# Altium PCB PCB_RUDRV2.PcbDoc
Units mm, origin at the board's own origin, x right, y up, seen from the top; angles counter-clockwise.
Board outline 79.75 x 99.93 mm, 2 copper layers (Top Layer, Bottom Layer); 62 components, 41 nets, 265 pads, 45 vias.
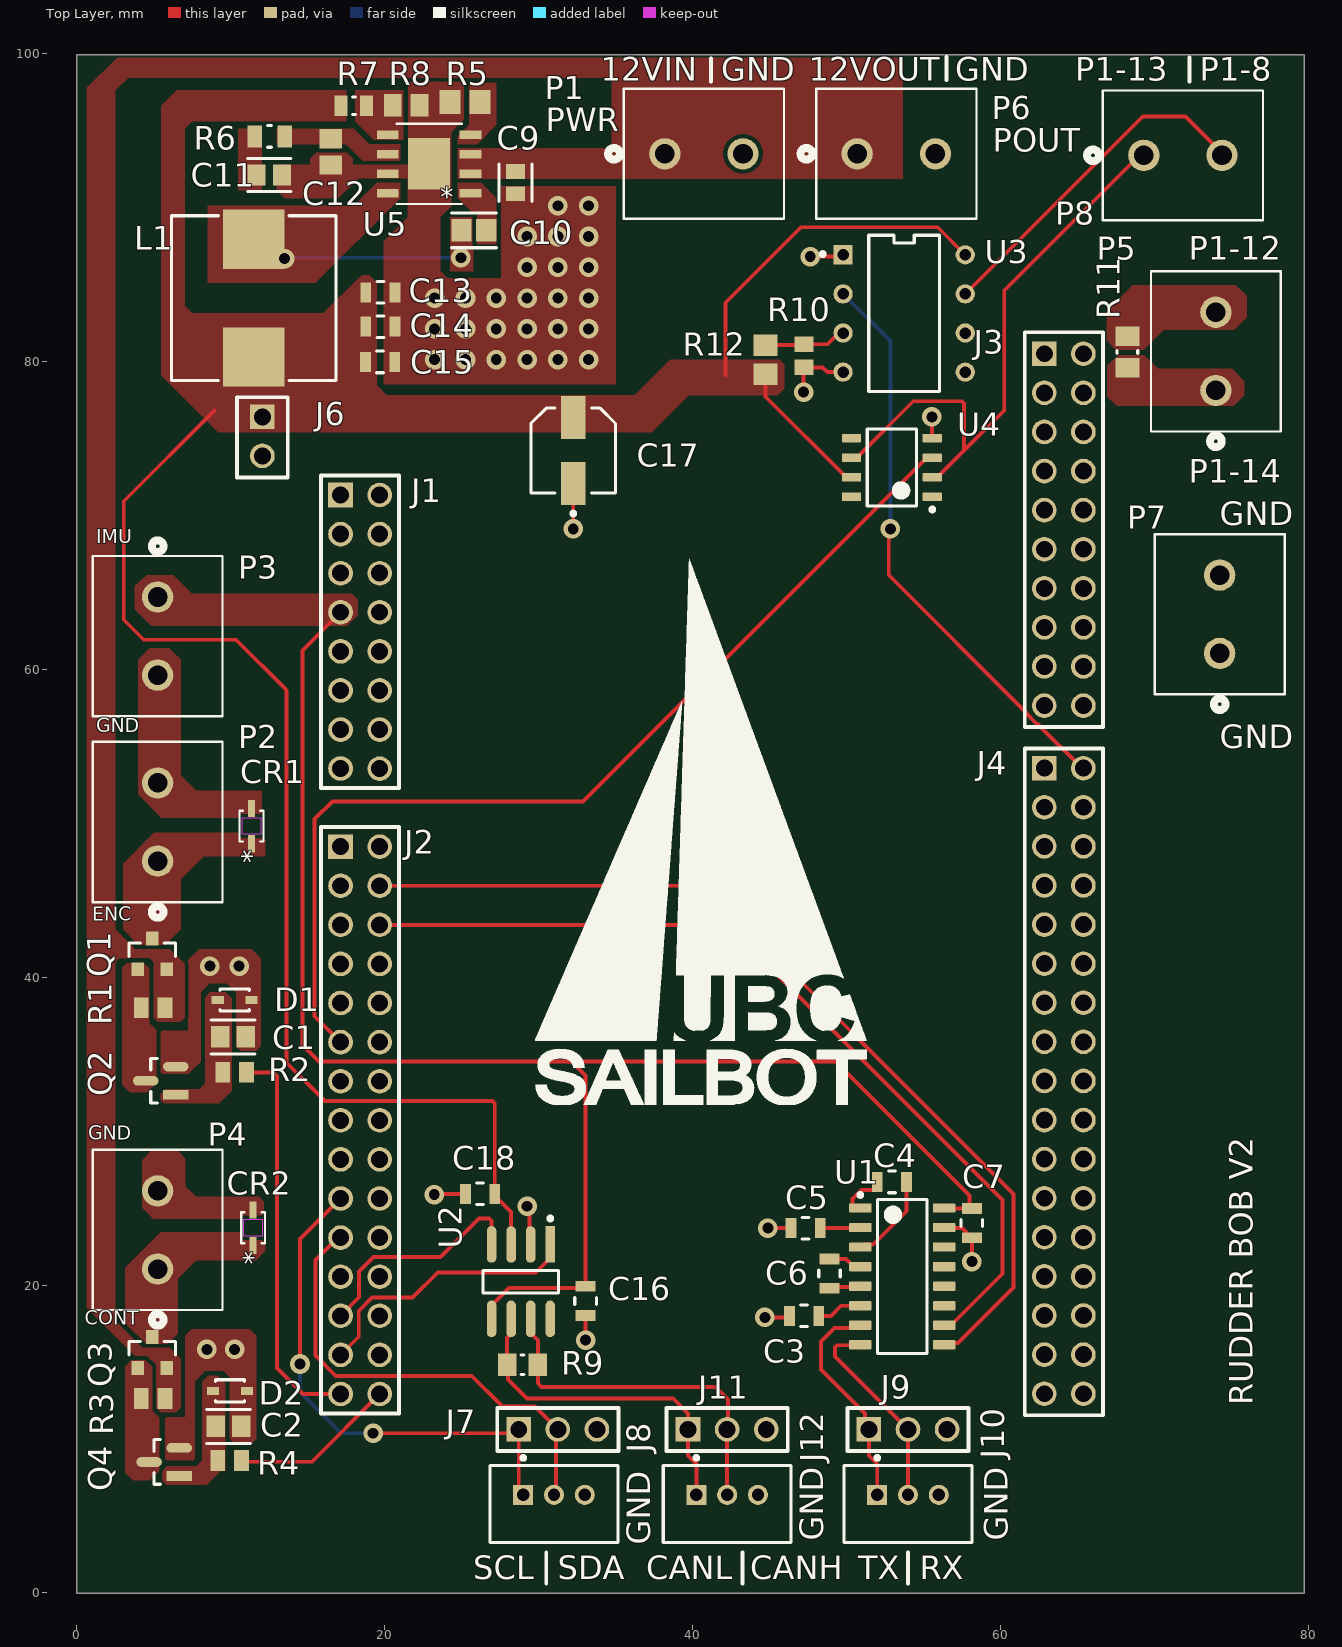
[diagram p0: Top Layer view]
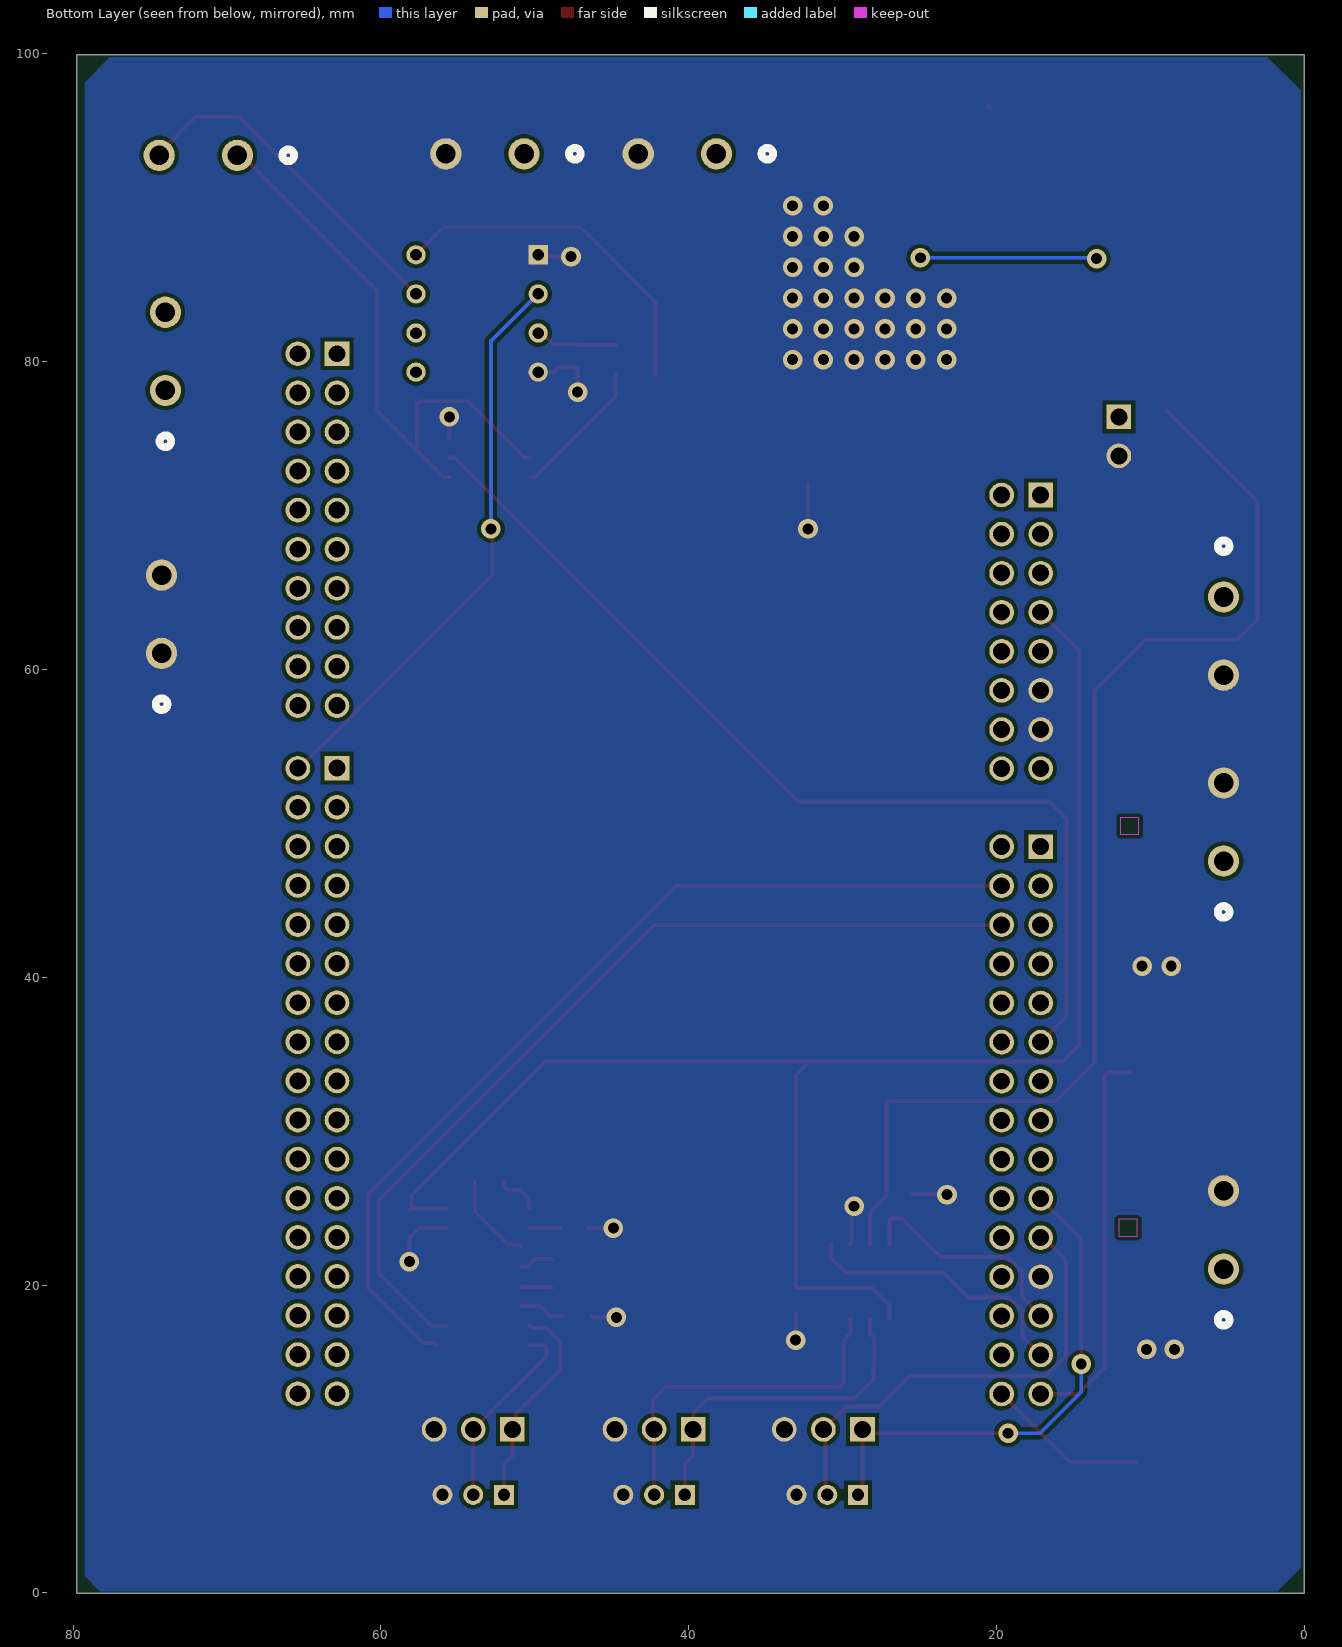
[diagram p1: Bottom Layer view, seen from below]
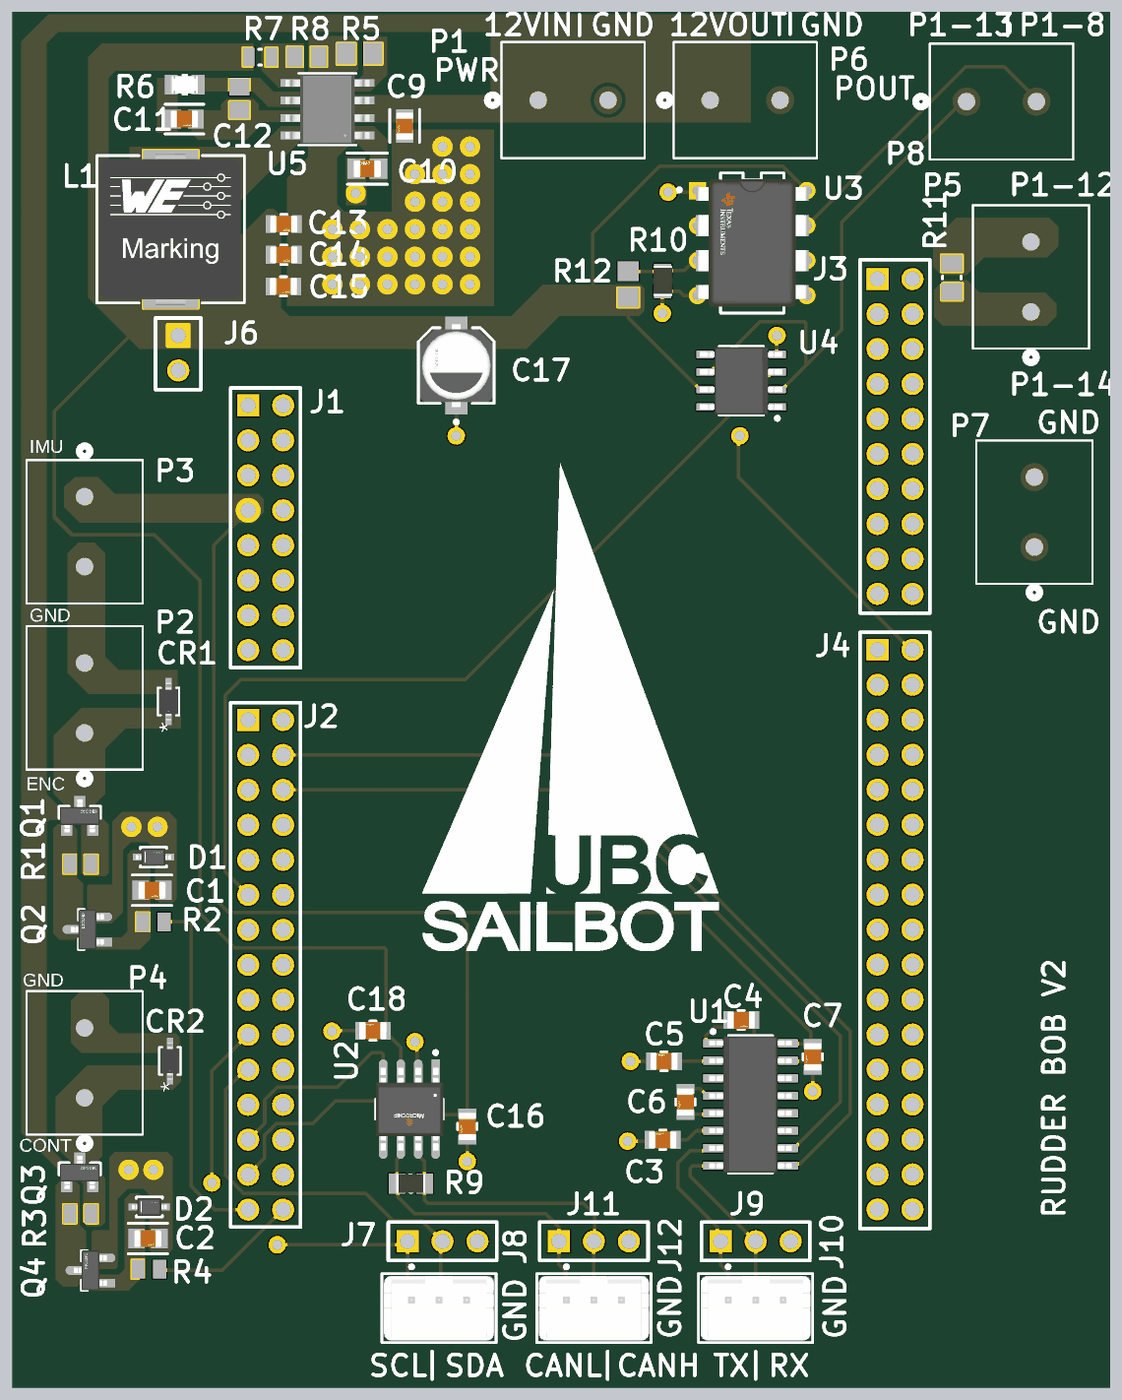
[diagram p2: 3D render of the assembled board from above, using the file's embedded part models]

## Layer stack, top to bottom
Top Solder: solder mask 0.0102, Solder Resist, Dk 3.5
Top Layer: signal copper 0.0356
Dielectric 1: dielectric 0.32, FR-4, Dk 4.8
Bottom Layer: signal copper 0.0356
Bottom Solder: solder mask 0.0102, Solder Resist, Dk 3.5

## Board outline
0.004,-0.01 79.75,-0.01 79.75,99.925 0.004,99.925

## Design rules (kind name [scope] priority, off if disabled: settings)
AssemblyTestPointUsage [All] p1: isadvanced=TRUE
AssemblyTestpoint [All] p1: isadvanced=TRUE testpointundercomponent=TRUE minsize=1.016 maxsize=2.54 preferedsize=1.524 minholesize=0 maxholesize=1.016 preferedholesize=0.813 testpointgrid=0.025 usegrid=TRUE gridtolerance=0 allowsidetop=TRUE allowsidebottom=TRUE
Clearance Clearance_1 [OnMid vs OnMid] p1: gap=0.254 ignorepadtopadclearanceinfootprint=FALSE sourcerule=39 cellrowname=All cellrowtype=0 cellcolname=All cellcoltype=0 innerlayers=TRUE
Clearance Clearance_2 [(ExistsOnLayer('Top Layer') Or ExistsOnLayer('Bottom Layer')) vs (ExistsOnLayer('Top Layer') Or ExistsOnLayer('Bottom Layer'))] p2: gap=0.254 ignorepadtopadclearanceinfootprint=FALSE sourcerule=39 cellrowname=All cellrowtype=0 cellcolname=All cellcoltype=0 outerlayers=TRUE
Clearance [All] p3: gap=0.254 ignorepadtopadclearanceinfootprint=FALSE ismatrix=TRUE
ComponentClearance [All] p1: isadvanced=TRUE gap=0.254 collisioncheckmode=3 verticalgap=0.254 showdistances=FALSE
FabricationTestPointUsage [All] p1: isadvanced=TRUE valid=0 allowmultiple=FALSE
FabricationTestpoint [All] p1: isadvanced=TRUE side=3 testpointundercomponent=TRUE minsize=1.016 maxsize=2.54 preferedsize=1.524 minholesize=0 maxholesize=1.016 preferedholesize=0.813 testpointgrid=0.025 allowsidetop=TRUE allowsidebottom=TRUE usegrid=TRUE gridtolerance=0
FanoutControl Fanout_BGA [IsBGA] p1: isadvanced=TRUE bgadir=Out bgaviamode=Centered fanoutstyle=Auto fanoutdirection=Alternating viagrid=0.025 // Fanout_BGA (Default Rule)
FanoutControl Fanout_LCC [IsLCC] p2: isadvanced=TRUE bgadir=Out bgaviamode=Centered fanoutstyle=Auto fanoutdirection=Alternating viagrid=0.025 // Fanout_LCC (Default Rule)
FanoutControl Fanout_SOIC [IsSOIC] p3: isadvanced=TRUE bgadir=Out bgaviamode=Centered fanoutstyle=Auto fanoutdirection=Alternating viagrid=0.025 // Fanout_SOIC (Default Rule)
FanoutControl Fanout_Small [(CompPinCount < 5)] p4: isadvanced=TRUE bgadir=Out bgaviamode=Centered fanoutstyle=Auto fanoutdirection=OutThenIn viagrid=0.025 // Fanout_Small (Default Rule)
FanoutControl Fanout_Default [All] p5: isadvanced=TRUE bgadir=Out bgaviamode=Centered fanoutstyle=Auto fanoutdirection=Alternating viagrid=0.025 // Fanout_Default (Default Rule)
Height [All] p1: isadvanced=TRUE minheight=0 maxheight=25.4 prefheight=12.7
HoleSize [All] p1: isadvanced=TRUE absolutevalues=TRUE maxlimit=2.54 minlimit=0.025 maxpercent=80.000 minpercent=20.000
HoleToHoleClearance [All] p1: isadvanced=TRUE gap=0.254 allowstackedmicrovias=TRUE
LayerPairs [All] p1: isadvanced=TRUE enforce=TRUE
MinimumSolderMaskSliver [All] p1: isadvanced=TRUE minsoldermaskwidth=0.254
NetAntennae [All] p1: isadvanced=TRUE netantennaetolerance=0
PasteMaskExpansion [All] p1: isadvanced=TRUE expansion=0
PlaneClearance [All] p1: isadvanced=TRUE clearance=0.508
PlaneConnect [All] p1: isadvanced=TRUE planeconnectstyle=Relief reliefexpansion=0.508 reliefentries=4 reliefconductorwidth=0.254 reliefairgap=0.254
PolygonConnect [All] p1: connectstyle=Direct reliefconductorwidth=0.254 reliefentries=4 polygonreliefangle="90 Angle" airgapwidth=0.254
RoutingCorners [All] p1: isadvanced=TRUE cornerstyle=45-Degree minsetback=2.54 maxsetback=2.54
RoutingPriority [All] p1: isadvanced=TRUE routingpriority=0
RoutingVias [All] p1: holewidth=0.711 width=1.27 viastyle="Through Hole" minholewidth=0.711 minwidth=1.27 maxholewidth=0.711 maxwidth=1.27
ShortCircuit [All] p1: isadvanced=TRUE allowed=FALSE
SilkToSilkClearance [All] p1: isadvanced=TRUE silktosilkclearance=0.254
SilkToSolderMaskClearance [IsPad] p1: isadvanced=TRUE minsilkscreentomaskgap=0.254 clearancetoexposedcopper=TRUE
SolderMaskExpansion [All] p1: isadvanced=TRUE expansion=0.102 istentingtop=FALSE
SupplyNets "Schematic Supply Nets_2" [InNet('GND')] p1: isadvanced=TRUE voltage=0.000
SupplyNets "Schematic Supply Nets_1" [InNet('5VIN')] p2: isadvanced=TRUE voltage=0.000
SupplyNets "Schematic Supply Nets" [InNet('12VIN')] p3: isadvanced=TRUE voltage=0.000
UnRoutedNet [All] p1: isadvanced=TRUE
UnpouredPolygon [All] p1: isadvanced=TRUE
Width [All] p1: maxlimit=0.254 minlimit=0.254 preferedwidth=0.254
4 further rules are at their usual default settings.

## Classes and differential pairs
component class MainBOB_RUDRV2: * C1 C2 C3 C4 C5 C6 C7 C16 C17 C18 CR1 CR2 D1 D2 J1 J2 J3 J4 J6 J7 J8 J9 J10 J11 J12 P1 P2 P3 P4 P5 P6 P7 P8 Q1 Q2 Q3 Q4 R1 R2 R3 R4 R9 R10 R11 R12 U1 U2 U3 U4
component class 5VBuch_RUDRV2: * C9 C10 C11 C12 C13 C14 C15 L1 R5 R6 R7 R8 U5

## Components (designator, comment, footprint, x,y, rotation, side; value= is the part's Value field where it differs from the comment)
C1 "0.47uF" FP-GRM21B-0_15-IPC_B 10.15,36.125 r0 top
C2 "0.47uF" FP-GRM21B-0_15-IPC_B 9.85,10.825 r0 top
C3 "0.1uF" FP-GCM21B-0_15-MFG 47.25,18 r180 top
C4 "0.1uF" FP-GCM21B-0_15-MFG 52.95,26.7 r0 top
C5 "0.1uF" FP-GCM21B-0_15-MFG 47.35,23.7 r180 top
C6 "0.1uF" FP-GCM21B-0_15-MFG 48.9,20.75 r270 top
C7 "0.1uF" FP-GCM21B-0_15-MFG 58.15,24.025 r270 top
C9 "10 uF" FP-GRM21B-0_1-IPC_C 28.5,91.625 r270 top
C10 "100 nF" FP-0805-L_2_01_0_2-W_1_25-IPC_B 25.792,88.523 r180 top
C11 "3.3 nF" FP-GRM216-0_1-IPC_B 12.5,92.125 r0 top
C12 "47 pF" CAPC2013X135X50NL15T20 16.5,93.625 r90 top
C13 "22 uF" FP-GRM21B-0_15-MFG 19.725,84.5 r0 top
C14 "22 uF" FP-GRM21B-0_15-MFG 19.725,82.275 r0 top
C15 "22 uF" FP-GRM21B-0_15-MFG 19.7,79.975 r0 top
C16 "0.1uF" FP-GCM21B-0_15-MFG 33.05,18.975 r270 top
C17 "10uF" FP-FKC-MFG 32.25,74.225 r90 top
C18 "0.1uF" FP-GCM21B-0_15-MFG 26.2,25.925 r180 top
CR1 "CUS10S30,H3FT" USC_TOS 11.35,49.825 r90 top
CR2 "CUS10S30,H3FT" USC_TOS 11.45,23.725 r90 top
D1 "CDSOD323-T05SC" FP-SOD-323-CA-MFG 10.25,38.525 r0 top
D2 "CDSOD323-T05SC" FP-SOD-323-CA-MFG 9.95,13.125 r0 top
J1 "CN8 CONN HDR 16POS" CN8_8X2_PADS 17.134,71.333 r0 top
J2 "CN9 CONN HDR 30POS" CN9_15X2_PADS 17.134,48.486 r0 top
J3 "CN7 CONN HDR 20POS" CN7_10X2_PADS 62.854,80.508 r0 top
J4 "CN10 CONN HDR 34POS" CN10_17X2_PADS 62.854,53.584 r0 top
J6 "5V_EXT" 5V_EXT 12.054,76.413 r0 top
J7 "CN 3PIN" "3X1 CON" 28.71,10.625 r90 top
J8 "440054-3" FP-440054-3-MFG 31,5.775 r180 top
J9 "CN 3PIN" "3X1 CON" 51.46,10.625 r90 top
J10 "440054-3" FP-440054-3-MFG 54,5.775 r180 top
J11 "CN 3PIN" "3X1 CON" 39.71,10.625 r90 top
J12 "440054-3" FP-440054-3-MFG 42.25,5.775 r180 top
L1 "5.5 uH" WE-HCI_1050 11.5,84.125 r0 top
P1 "282837-2" 282837-2_TYC 38.2,93.5 r0 top
P2 "282837-2" 282837-2_TYC 5.25,47.545 r90 top
P3 "282837-2" 282837-2_TYC 5.25,64.705 r270 top
P4 "282837-2" 282837-2_TYC 5.25,21.045 r90 top
P5 "282837-2" 282837-2_TYC 74,78.125 r90 top
P6 "282837-2" 282837-2_TYC 50.7,93.5 r0 top
P7 "282837-2" 282837-2_TYC 74.25,61.045 r90 top
P8 "282837-2" 282837-2_TYC 69.32,93.4 r0 top
Q1 "DMG2301L-7" FP-SOT23-MFG 4.9,41.525 r90 top
Q2 "MMBT3904-7-F" FP-SOT23-IPC_A 5.45,33.275 r180 top
Q3 "DMG2301L-7" FP-SOT23-MFG 4.9,15.625 r90 top
Q4 "MMBT3904-7-F" FP-SOT23-IPC_A 5.673,8.51 r180 top
R1 "200k" RESC2013X70X40LL20T20 4.95,38.025 r0 top
R2 "200k" RESC2013X70X40LL20T20 10.25,33.825 r180 top
R3 "200k" RESC2013X70X40LL20T20 4.95,12.625 r0 top
R4 "200k" RESC2013X70X40LL20T20 9.925,8.6 r180 top
R5 "200k" RESC2013X70X40ML20T20 25.225,96.875 r0 top
R6 "14k" FP-CRCW0805-e3-MFG 12.525,94.625 r180 top
R7 "115k" RESC2013X50X30LL20T20 18,96.625 r180 top
R8 "22.1k" RESC2013X70X40NL20T20 21.391,96.651 r180 top
R9 "120" RESC2013X60X35ML10T20 28.95,14.825 r180 top
R10 "10K" RESC2013X60X40LL20T25_A 47.25,80.375 r90 top
R11 "CRCW08055K00FKTA" RESC2013X50X30ML20T20 68.25,80.625 r90 top
R12 "22k" RESC2013X60X40ML20T25 44.75,80.125 r90 top
U1 "MAX3232EIDR" D0016A_N 53.625,20.565 r0 top
U2 "MCP2562FDT-H/SN" FP-C04-057-SN-IPC_A 28.85,20.225 r270 top
U3 "LM311P" FP-P0008A-MFG 53.75,83.125 r0 top
U4 "UA741CDR" D0008A_L 52.95,73.125 r180 top
U5 "AP64350SP-13" SO-8EP_DIO 22.89,92.841 r180 top

## Footprints (in the part's own frame and the unit in brackets; to place one, negate y for a bottom-side part, rotate by r counter-clockwise, add the part's x,y. Pads: shape width x height; smd on the part's side, far side on the other; paste and mask are expansions set on the pad)
"3X1 CON" [mm]
  rect 1.6x1.6 hole 1.1: 1(0,0)
  round 1.6 hole 1.1: 2(0,-2.54) 3(0,-5.08)
  silkscreen extent -1.4,-6.48 1.4,1.4
5V_EXT [mm]
  rect 1.6x1.6 hole 1.1: 1(0,0)
  round 1.6 hole 1.1: 2(0,-2.54)
  silkscreen extent -1.65,-3.94 1.65,1.27
282837-2_TYC [mil]
  round 80 / inner round 60 / far side round 80 hole 50 paste-99999 mask-40: 1(0,0) 2(200,0)
  silkscreen extent -145,-166 305,166
CAPC2013X135X50NL15T20 [mm] "Chip Capacitor, 2-Leads, Body 2.00x1.25mm, IPC Medium Density"
  rect 1.25x1.45 smd: 1(-0.85,0) 2(0.85,0)
  body extent -1.08,-0.7 1.07,0.7, height 1.35
CN7_10X2_PADS [mm]
  rect 1.6x1.6 hole 1.1: 1(0,0)
  round 1.6 hole 1.1: 2(2.54,0) 3(0,-2.54) 4(2.54,-2.54) 5(0,-5.08) 6(2.54,-5.08) 7(0,-7.62) 8(2.54,-7.62) 9(0,-10.16) 10(2.54,-10.16) 11(0,-12.7) 12(2.54,-12.7) 13(0,-15.24) 14(2.54,-15.24) 15(0,-17.78) 16(2.54,-17.78) 17(0,-20.32) 18(2.54,-20.32) 19(0,-22.86) 20(2.54,-22.86)
  silkscreen extent -1.27,-24.26 3.81,1.4
CN8_8X2_PADS [mm]
  rect 1.6x1.6 hole 1.1: 1(0,0)
  round 1.6 hole 1.1: 2(2.54,0) 3(0,-2.54) 4(2.54,-2.54) 5(0,-5.08) 6(2.54,-5.08) 7(0,-7.62) 8(2.54,-7.62) 9(0,-10.16) 10(2.54,-10.16) 11(0,-12.7) 12(2.54,-12.7) 13(0,-15.24) 14(2.54,-15.24) 15(0,-17.77) 16(2.54,-17.78)
  silkscreen extent -1.27,-19.05 3.81,1.27
CN9_15X2_PADS [mm]
  rect 1.6x1.6 hole 1.1: 1(0,0)
  round 1.6 hole 1.1: 2(2.54,0) 3(0,-2.54) 4(2.54,-2.54) 5(0,-5.08) 6(2.54,-5.08) 7(0,-7.62) 8(2.54,-7.62) 9(0,-10.16) 10(2.54,-10.16) 11(0,-12.7) 12(2.54,-12.7) 13(0,-15.24) 14(2.54,-15.24) 15(0,-17.78) 16(2.54,-17.78) 17(0,-20.32) 18(2.54,-20.32) 19(0,-22.86) 20(2.54,-22.86) 21(0,-25.4) 22(2.54,-25.4) 23(0,-27.94) 24(2.54,-27.94) 25(0,-30.48) 26(2.54,-30.48) 27(0,-33.02) 28(2.54,-33.02) 29(0,-35.56) 30(2.54,-35.56)
  silkscreen extent -1.27,-36.83 3.81,1.27
CN10_17X2_PADS [mm]
  rect 1.6x1.6 hole 1.1: 1(0,0)
  round 1.6 hole 1.1: 2(2.54,0) 3(0,-2.54) 4(2.54,-2.54) 5(0,-5.08) 6(2.54,-5.08) 7(0,-7.62) 8(2.54,-7.62) 9(0,-10.16) 10(2.54,-10.16) 11(0,-12.7) 12(2.54,-12.7) 13(0,-15.24) 14(2.54,-15.24) 15(0,-17.78) 16(2.54,-17.78) 17(0,-20.32) 18(2.54,-20.32) 19(0,-22.86) 20(2.54,-22.86) 21(0,-25.4) 22(2.54,-25.4) 23(0,-27.94) 24(2.54,-27.94) 25(0,-30.48) 26(2.54,-30.48) 27(0,-33.02) 28(2.54,-33.02) 29(0,-35.56) 30(2.54,-35.56) 31(0,-38.1) 32(2.54,-38.1) 33(0,-40.64) 34(2.54,-40.64)
  silkscreen extent -1.27,-42.04 3.81,1.27
D0008A_L [mm] "SOIC, 8-Leads, Body 5x4mm, Pitch 1.27mm, IPC High Density"
  rrect18% 1.25x0.55 smd: 1(-2.625,1.905) 2(-2.625,0.635) 3(-2.625,-0.635) 4(-2.625,-1.905) 5(2.625,-1.905) 6(2.625,-0.635) 7(2.625,0.635) 8(2.625,1.905)
  silkscreen extent -2.75,-2.5 1.6,2.85, body extent -3,-2.45 3,2.45, height 1.63
D0016A_N [mm] "SOIC, 16-Leads, Body 10x4mm, Pitch 1.27mm, IPC Medium Density"
  rrect17% 1.45x0.6 smd: 1(-2.725,4.445) 2(-2.725,3.175) 3(-2.725,1.905) 4(-2.725,0.635) 5(-2.725,-0.635) 6(-2.725,-1.905) 7(-2.725,-3.175) 8(-2.725,-4.445) 9(2.725,-4.445) 10(2.725,-3.175) 11(2.725,-1.905) 12(2.725,-0.635) 13(2.725,0.635) 14(2.725,1.905) 15(2.725,3.175) 16(2.725,4.445)
  silkscreen extent -2.85,-5 1.6,5.42, body extent -3,-4.95 3,4.95, height 1.59
FP-0805-L_2_01_0_2-W_1_25-IPC_B [mm]
  rect 1.305x1.456 smd paste+0 mask+0: 1(-0.806,0) 2(0.806,0)
  silkscreen extent -1.46,-1.13 1.46,1.13, body extent -1.71,-0.98 1.71,0.98, height 0.25
FP-440054-3-MFG [mm]
  rect 1.3x1.3 hole 0.8 paste-2539.97 mask+0: 1(2,-0.6)
  round 1.3 hole 0.8 paste-2539.97 mask+0: 2(0,-0.6) 3(-2,-0.6)
  silkscreen extent -4.15,-3.12 4.15,2.5, body extent -4.25,-2.6 4.25,2.6, height 0.25
FP-C04-057-SN-IPC_A [mm]
  rect 2.377x0.622 smd paste+0 mask+0: 1(-2.418,1.905)
  rrect100% 2.377x0.622 smd paste+0 mask+0: 2(-2.418,0.635) 3(-2.418,-0.635) 4(-2.418,-1.905) 5(2.418,-1.905) 6(2.418,-0.635) 7(2.418,0.635) 8(2.418,1.905)
  silkscreen extent -4.23,-2.45 0.73,2.45, body extent -4.11,-2.95 4.11,2.95, height 0.25
FP-CRCW0805-e3-MFG [mm]
  rect 0.95x1.45 smd paste+0 mask+0: 1(-0.975,0) 2(0.975,0)
  silkscreen extent -0.13,-0.7 0.13,0.7, body extent -1.55,-0.82 1.55,0.82, height 0.25
FP-FKC-MFG [mm]
  rect 2.8x1.6 smd paste+0 mask+0: 1(-2.15,0) 2(2.15,0)
  silkscreen extent -4.22,-2.75 2.75,2.75, body extent -3.8,-3 3.8,3, height 0.25
FP-GCM21B-0_15-MFG [mm]
  rect 0.7x1.3 smd paste+0 mask+0: 1(-0.95,0) 2(0.95,0)
  silkscreen extent -0.23,-0.7 0.23,0.7, body extent -1.4,-0.8 1.4,0.8, height 0.25
FP-GRM21B-0_1-IPC_C [mm]
  rect 0.958x1.262 smd paste+0 mask+0: 1(-0.727,0) 2(0.727,0)
  silkscreen extent -1.21,-1.07 1.21,1.07, body extent -1.31,-0.77 1.31,0.77, height 0.25
FP-GRM21B-0_15-IPC_B [mm]
  rect 1.206x1.408 smd paste+0 mask+0: 1(-0.826,0) 2(0.826,0)
  silkscreen extent -1.43,-1.1 1.43,1.1, body extent -1.68,-0.95 1.68,0.95, height 0.25
FP-GRM21B-0_15-MFG [mm]
  rect 0.7x1.3 smd paste+0 mask+0: 1(-0.95,0) 2(0.95,0)
  silkscreen extent -0.23,-0.7 0.23,0.7, body extent -1.4,-0.8 1.4,0.8, height 0.25
FP-GRM216-0_1-IPC_B [mm]
  rect 1.158x1.361 smd paste+0 mask+0: 1(-0.827,0) 2(0.827,0)
  silkscreen extent -1.41,-1.08 1.41,1.08, body extent -1.66,-0.93 1.66,0.93, height 0.25
FP-P0008A-MFG [mm]
  rect 1.25x1.25 hole 0.75 paste-2539.97 mask+0: 1(-3.97,3.81)
  round 1.25 hole 0.75 paste-2539.97 mask+0: 2(-3.97,1.27) 3(-3.97,-1.27) 4(-3.97,-3.81) 5(3.97,-3.81) 6(3.97,-1.27) 7(3.97,1.27) 8(3.97,3.81)
  silkscreen extent -5.42,-5.08 2.3,5.08, body extent -4.69,-5.18 4.69,5.18, height 0.25
FP-SOD-323-CA-MFG [mm]
  rect 0.8x0.5 smd paste+0 mask+0: 1(-1.1,0) 2(1.1,0)
  silkscreen extent -0.95,-0.72 0.95,0.72, body extent -1.6,-0.82 1.6,0.82, height 0.25
FP-SOT23-IPC_A [mm]
  rect 1.659x0.627 smd paste+0 mask+0: 1(-0.977,0.915)
  rrect100% 1.659x0.627 smd paste+0 mask+0: 2(-0.977,-0.915) 3(0.977,0)
  silkscreen extent 0.23,-1.45 0.65,1.45, body extent -2.31,-1.95 2.31,1.95, height 0.25
FP-SOT23-MFG [mm]
  rect 0.9x0.8 smd paste+0 mask+0: 1(-1,0.95) 2(-1,-0.95) 3(1,0)
  silkscreen extent -0.18,-1.5 0.7,1.5, body extent -1.55,-1.6 1.55,1.6, height 0.25
RESC2013X50X30LL20T20 [mm] "Chip Resistor, 2-Leads, Body 2.00x1.25mm, IPC High Density"
  rect 0.85x1.35 smd: 1(-0.825,0) 2(0.825,0)
  silkscreen extent -0.1,-0.58 0.1,0.58, body extent -1.1,-0.72 1.1,0.72, height 0.5
RESC2013X50X30ML20T20 [mm] "Chip Resistor, 2-Leads, Body 2.00x1.25mm, IPC Low Density"
  rect 1.25x1.55 smd: 1(-1.025,0) 2(1.025,0)
  silkscreen extent -0.1,-0.67 0.1,0.67, body extent -1.1,-0.72 1.1,0.72, height 0.5
RESC2013X60X35ML10T20 [mm] "Chip Resistor, 2-Leads, Body 2.1x1.35mm, IPC Low Density"
  rect 1.2x1.45 smd: 1(-1,0) 2(1,0)
  silkscreen extent -0.1,-0.63 0.1,0.63, body extent -1.05,-0.68 1.05,0.67, height 0.6
RESC2013X60X40LL20T25_A [mm] "Chip Resistor, 2-Leads, Body 2.20x1.35mm, IPC High Density"
  rect 1x1.25 smd: 1(-0.75,0) 2(0.75,0)
  body extent -1.1,-0.67 1.1,0.67, height 0.6
RESC2013X60X40ML20T25 [mm] "Chip Resistor, 2-Leads, Body 2.00x1.25mm, IPC Low Density"
  rect 1.4x1.55 smd: 1(-0.95,0) 2(0.95,0)
  body extent -1.1,-0.72 1.1,0.72, height 0.6
RESC2013X70X40LL20T20 [mm] "Chip Resistor, 2-Leads, Body 2.00x1.25mm, IPC High Density"
  rect 0.95x1.35 smd: 1(-0.775,0) 2(0.775,0)
  body extent -1.1,-0.72 1.1,0.72, height 0.7
RESC2013X70X40ML20T20 [mm] "Chip Resistor, 2-Leads, Body 2.00x1.25mm, IPC Low Density"
  rect 1.35x1.55 smd: 1(-0.975,0) 2(0.975,0)
  body extent -1.1,-0.72 1.1,0.72, height 0.7
RESC2013X70X40NL20T20 [mm] "Chip Resistor, 2-Leads, Body 2.00x1.25mm, IPC Medium Density"
  rect 1.15x1.45 smd: 1(-0.875,0) 2(0.875,0)
  body extent -1.1,-0.72 1.1,0.72, height 0.7
SO-8EP_DIO [mil]
  rect 56x22 smd paste+0 mask+0: 1(-106,75) 2(-106,25) 3(-106,-25) 4(-106,-75) 5(106,-75) 6(106,-25) 7(106,25) 8(106,75)
  rect 107x132 smd paste-65.5 mask+0: EPAD(0,0)
  silkscreen extent -83,-103 83,103, body extent -120,-97 120,97, height 64
USC_TOS [mm]
  rect 1.111x0.451 smd paste+0 mask+0: 1(-1.15,0) 2(1.15,0)
  Keep-Out Layer region: -0.544,-0.599 -0.544,0.599 0.544,0.599 0.544,-0.599
  silkscreen extent -1,-0.78 1,0.78, body extent -1.35,-0.65 1.35,0.65, height 1.1
WE-HCI_1050 [mm] "SMT Flat Wire High Current Inductor, body 10.2x10.2mm"
  rect 4x3.85 smd: 1(0,3.825) 2(0,-3.825)
  silkscreen extent -5.35,-5.35 5.35,5.35, body extent -5.1,-5.5 5.1,5.5, height 5

## Part data
C1 C2: library part CMP-2007-03605-2, "Chip Multilayer Ceramic Capacitors for General Purpose, 0805, 0.47uF, X7R, 15%, 10%, 100V", Capacitance=470nF, Case Code (Imperial)=0805, Case Code (Metric)=2012, Dielectric=X7R, Max Operating Temperature=125°C, Min Operating Temperature=-55°C, Package Quantity=1, Tolerance=10%, Voltage=100V, Case/Package=0805, Depth=1.25mm, Height=1.25mm, Lead Free="Lead Free", Length=2mm, Material=Ceramic, Mount="Surface Mount", Packaging="Tape and Reel", Radiation Hardening=No, REACH SVHC="No SVHC", Termination=SMD/SMT, Thickness=0.053inch, Voltage Rating=100V, Voltage Rating (DC)=100V, Width=1.25mm
C3 C4 C5 C6 C7 C16 C18: library part CMP-2007-03364-2, "Ceramic Capacitor for Automotive 100nF ±10% 100VDC X7R 0805 Embossed T/R", Capacitance=100nF, Case Code (Imperial)=0805, Case Code (Metric)=2012, Dielectric=X7R, Max Operating Temperature=125°C, Min Operating Temperature=-55°C, Package Quantity=1, Ratings=AEC-Q200, Tolerance=10%, Voltage=100V, Case/Package=0805, Depth=1.25mm, Height=1.25mm, Lead Free="Lead Free", Length=2mm, Mount="Surface Mount", Packaging="Tape and Reel", Radiation Hardening=No, REACH SVHC="No SVHC", Termination=SMD/SMT, Thickness=0.055inch, Voltage Rating=100V, Voltage Rating (DC)=100V, Width=0.049inch
C9: library part CMP-2007-03453-2, "Chip Multilayer Ceramic Capacitors for General Purpose, 0805, 10uF, X5R, 15%, 10%, 16V", Capacitance=10uF, Case Code (Imperial)=0805, Case Code (Metric)=2012, Dielectric=X5R, Max Operating Temperature=85°C, Min Operating Temperature=-55°C, Package Quantity=1, Tolerance=10%, Voltage=16V, Case/Package=0805, Depth=1.25mm, Height=1.25mm, Lead Free="Lead Free", Length=2mm, Material=Ceramic, Mount="Surface Mount", Packaging="Tape and Reel", Radiation Hardening=No, REACH SVHC="No SVHC", Termination=SMD/SMT, Thickness=0.053inch, Voltage Rating=16V, Voltage Rating (DC)=16V, Width=1.25mm
C10: library part CMP-2007-04172-2, "Automotive Ceramic Capacitor, 0805, 100nF, 10%, X7R, 15%, 100V", Capacitance=100nF, Case Code (Imperial)=0805, Case Code (Metric)=2012, Dielectric=X7R, Dielectric Material=Ceramic, Max Operating Temperature=125°C, Min Operating Temperature=-55°C, Package Quantity=1, Ratings=AEC-Q200, Tolerance=10%, Voltage=100V, Case/Package=0805, Construction=Flat, Depth=1.25mm, Height=1.4mm, Lead Free="Lead Free", Length=2.01mm, Mount="Surface Mount", Number of Pins=2, Packaging="Tape and Reel", Radiation Hardening=No, REACH SVHC="No SVHC", RoHS Compliant=Yes, Series=-, Termination=SMD/SMT, Thickness=0.055inch, Voltage Rating=100V, Voltage Rating (DC)=100V, Width=0.049inch
C11: library part CMP-2007-00889-2, "Chip Multilayer Ceramic Capacitors for General Purpose, 0805, 3300pF, C0G, 30ppm/°C, 5%, 50V", Capacitance=3.3nF, Case Code (Imperial)=0805, Case Code (Metric)=2012, Dielectric=C0G, Dielectric Material=Ceramic, Insulation Resistance=10GR, Max Operating Temperature=125°C, Min Operating Temperature=-55°C, Package Quantity=1, Temperature Coefficient=30ppm/°C, Tolerance=5%, Voltage=50V, Case/Package=0805, Construction=Flat, Depth=1.25mm, Height=0.6mm, Lead Free="Lead Free", Length=2mm, Material=Ceramic, Mount="Surface Mount", Number of Pins=2, Packaging="Tape and Reel", REACH SVHC="No SVHC", RoHS Compliant=Yes, Series=GRM, Size=0.6mm, Termination=SMD/SMT, Thickness=0.028inch, Voltage Rating=50V, Voltage Rating (DC)=50V, Width=0.049inch
C12: library part CMP-1036-01617-2, Manufacturer=Vitramon, Part Number=VJ0805A470JXACW1BC
C13 C14 C15: library part CMP-2007-03385-2, "Chip Multilayer Ceramic Capacitors for General Purpose, 0805, 22uF, X5R, 15%, 20%, 6.3V", Capacitance=22uF, Case Code (Imperial)=0805, Case Code (Metric)=2012, Dielectric=X5R, Max Operating Temperature=85°C, Min Operating Temperature=-55°C, Package Quantity=1, Tolerance=20%, Voltage=6.3V, Case/Package=0805, Depth=1.25mm, Height=1.25mm, Lead Free="Lead Free", Length=2mm, Material=Ceramic, Mount="Surface Mount", Packaging="Tape and Reel", Radiation Hardening=No, REACH SVHC="No SVHC", Termination=SMD/SMT, Thickness=0.053inch, Voltage Rating=6.3V, Voltage Rating (DC)=6.3V, Width=0.049inch
C17: library part CMP-05427-000030-1, "CAP ALUM 10UF 20% 50V SMD", Case/Package=Radial, Dielectric Material=Aluminium, ESR (Equivalent Series Resistance)=1.52R, Leakage Current=3uA, Max Operating Temperature=105°C, Min Operating Temperature=-55°C, Package Quantity=1000, Ripple Current=85mA, Tolerance=20%, Voltage=50V, Capacitance=10uF, Construction=Cylindrical, Contact Plating=Tin, Diameter=5mm, Height=5.8mm, Height - Seated (Max)=0.228inch, Impedance=1.52R, Lead Free="Lead Free", Length=5.8mm, Life (Hours)=2000Hour, Material=Aluminium, Mount="Surface Mount", Number of Pins=2, Packaging="Tape and Reel", Radiation Hardening=No, REACH SVHC="No SVHC", Ripple Current (AC)=85mA, RoHS Compliant=Yes, Series=FK, Termination=SMD/SMT, Voltage Rating=50V, Voltage Rating (DC)=50V, Width=6.5mm
CR1 CR2: "No Description Available", Mfr_Name="Toshiba Electronic Devices & Storage Corp."
D1 D2: library part CMP-07401-000040-1, "TVS DIODE 5VWM 14.5VC SOD323", Breakdown Voltage=6V, Capacitance=350pF, Clamping Voltage=13.5V, Leakage Current=10uA, Max Operating Temperature=150°C, Max Power Dissipation=400W, Max Surge Current=28A, Min Operating Temperature=-55°C, Operating Supply Voltage=5V, Package Quantity=3000, Peak Pulse Power=500W, Power Line Protection=No, Resistor Type=Zener, Test Current=1mA, Contact Plating=Tin, Depth=1.45mm, Diode Type=ZENER, Direction=Bidirectional, Element Configuration=Single, Length=1.9mm, Max Breakdown Voltage=6V, Min Breakdown Voltage=6V, Mount="Surface Mount", Number of Bidirectional Channels=1, Number Of Channels=1, Number of Elements=1, Number of Pins=2, Packaging="Tape and Reel", Peak Pulse Current=28A, Polarity=Bidirectional, Radiation Hardening=No, REACH SVHC="No SVHC", Reverse Breakdown Voltage=6V, Reverse Standoff Voltage=5V, RoHS Compliant=Yes, Series=CDSOD323, Termination=SMD/SMT, Working Voltage=5V
J1: "CN8 CONN HDR 16POS 0.1 STACK"
J2: "CN9 CONN HDR 30 POS  0.1 STACK"
J3: "CN7 CONN HDR 20 POS  0.1 STACK"
J4: "CN10 CONN HDR 34 POS  0.1 STACK"
J8 J10 J12: library part CMP-03369-000008-1, "CONN HEADER VERT 3POS 2MM", Current Rating=3A, Manufacturer="TE Connectivity", Package=0, Temperature="-25°C to +105°C", Temperature Range High=+105°C, Temperature Range Low=-25°C, Voltage Rating=250V, Automotive=No, Category=Conn, ComponentLink2Description=Datasheet, ComponentLink2URL=https://www.te.com/usa-en/product-440054-3.datasheet.pdf, Conn Gender=Male, Conn Orientation=Vertical, Contact Material=Tin,Nickel, Device Class L1=Connectors, Device Class L2="Headers and Wire Housings", Device Class L3=unset, Digikey Description="CONN HEADER VERT 3POS 2MM", Footprint Url=https://www.te.com/commerce/DocumentDelivery/DDEController?Action=showdoc&DocId=Customer+Drawing%7F440054%7FF6%7Fpdf%7FEnglish%7FENG_CD_440054_F6.pdf%7F440054-3, Height=6.35mm, Lead Free=Yes, Manufacturer Part Number=440054-3, Mouser Description="Headers & Wire Housings 3 POS HDR VERT 2.0mm", Number Of Contacts=3, Number Of Rows=1, Octopart=https://octopart.com/440054-3-te+connectivity-40394845, Pitch=2mm, RoHS=TRUE
L1: library part CMP-0226-00138-2, Ambient Temperature Range High=100°C, Ambient Temperature Range Low=-40°C, Case/Package=1050, Current Rating=10A, DC Resistance (DCR)=10.3mΩ, Inductance=5.5µH, Inductance Tolerance=20%, Max Operating Temperature=150°C, Saturation Current=12A, Self Resonant Frequency=30MHz, Series Resistance=10.3Ω, Test Frequency=100kHz, Composition=Wirewound, Depth=10.2mm, Height=4.7mm, Height - Seated (Max)=5.0038mm, Lead Free="Lead Free", Length=10.5mm, Max DC Current=10A, Min Operating Temperature=-40°C, Mount="Surface Mount", NexarPartId=7866439, Number of Pins=2, Packaging="Cut Tape (CT)", REACH SVHC=Unknown, Resistance=10.3mΩ, RMS Current (Irms)=10A, RoHS=Compliant, Shielding=Shielded, Termination=SMD/SMT, Tolerance=20%, Width=10.2mm
P1 P2 P3 P4 P5 P6 P7 P8: "No Description Available", Mfr_Name="TE Connectivity", RefDes=RefDes, Type=Type
Q1 Q3: library part CMP-12801-000065-1, "MOSFET P-CH 20V 3A SOT23", Continuous Drain Current=-3A, Drain To Source Breakdown Voltage=-20V, Drain to Source Resistance=120mΩ, Gate To Source Voltage=8V, Input Capacitace At Vds="476pF @ -10V", Manufacturer="Diodes Inc.", Max Forward Diode Voltage=-1.2V, Max Junction Temp=+150°C, Package=SOT23, Power Dissipation=1.5W, Pulse Drain Current=-10A, Temperature="-55°C to +150°C", Temperature Range Low=-55°C, Automotive=No, Category=Trans, ComponentLink2Description=Datasheet, ComponentLink2URL=https://www.diodes.com/assets/Datasheets/DMG2301L.pdf, Depletion Mode=False, Device Class L1="Discrete Semiconductors", Device Class L2=Transistors, Device Class L3=MOSFETs, Digikey Description="MOSFET P-CH 20V 3A SOT23", Drain To Source Voltage=-20V, Footprint Url=https://www.diodes.com/assets/Package-Files/SOT23.pdf, Gate Charge At Vgs="5.5nC @ -4.5V", Height=1.1mm, Lead Free=Yes, Manufacturer Part Number=DMG2301L-7, Mouser Description="Single P-Channel 20 V 1.5 W 5.5 nC Silicon Surface Mount Mosfet - SOT-23", Number Of Channels=1, Number Of P Channels=1, Octopart=https://octopart.com/dmg2301l-7-diodes+inc.-67250456, RoHS=TRUE, Rthja Max=83°C/W, Standoff Height=0.013mm, Temperature Range High=+150°C, Threshold Vgs Max=-1.2V, Threshold Vgs Min=-0.4V, Turn Off Delay Time=30ns, Turn On Delay Time=5ns
Q2 Q4: library part CMP-2000-04931-2, "TRANS NPN 40V 0.2A SMD SOT23-3", Case/Package=SOT-23, Collector Base Voltage (VCBO)=60V, Collector Emitter Breakdown Voltage=40V, Collector Emitter Saturation Voltage=300mV, Continuous Collector Current=200mA, Emitter Base Voltage (VEBO)=6V, Frequency=300MHz, Max Operating Temperature=150°C, Max Power Dissipation=300mW, Min Operating Temperature=-55°C, Package Quantity=3000, Power Dissipation=350mW, Collector Emitter Voltage (VCEO)=40V, Contact Plating=Tin, Element Configuration=Single, Gain Bandwidth Product=300MHz, Height=1mm, hFE Min=100, Lead Free="Lead Free", Length=3.05mm, Max Breakdown Voltage=40V, Max Collector Current=200mA, Max Frequency=300MHz, Mount="Surface Mount", Number of Elements=1, Number of Pins=3, Packaging="Tape and Reel", Polarity=NPN, Radiation Hardening=No, REACH SVHC="No SVHC", Transition Frequency=300MHz, Voltage Rating (DC)=40V, Weight=0.000282oz, Width=1.4mm
R1 R2 R3 R4: library part CMP-2001-00028-1, Manufacturer=Panasonic, Part Number=ERJ-6ENF2003V
R5: library part CMP-2001-00372-1, Manufacturer=Panasonic, Part Number=ERJ-6GEYJ204V
R6: library part CMP-2001-04956-2, "RES Thick Film, 14kΩ, 1%, 0.125W, 100ppm/°C, 0805", Case Code (Imperial)=0805, Case Code (Metric)=2012, Max Operating Temperature=155°C, Max Power Dissipation=125mW, Min Operating Temperature=-55°C, Package Quantity=10, Resistance=14kR, Temperature Coefficient=100ppm/°C, Tolerance=1%, Voltage Rating=150V, Case/Package=0805, Composition="Thick Film", Contact Plating=Tin, Depth=1.25mm, Features="Automotive AEC-Q200", Height=0.45mm, Lead Free="Lead Free", Length=2mm, Military Standard=Not, Mount="Surface Mount", Number of Pins=2, Number of Terminations=2, Packaging="Tape and Reel", Power Rating=125mW, Radiation Hardening=No, Termination=SMD/SMT, Voltage Rating (DC)=150V, Weight=0.000194oz, Width=1.25mm, Working Voltage=150V
R7: library part CMP-2001-04921-1, Manufacturer="Vishay Dale", Part Number=CRCW0805115KFKEA
R8: library part CMP-2001-00049-1, Manufacturer=Panasonic, Part Number=ERJ-6ENF2212V
R9: library part CMP-2100-03671-1, "Chip Resistor, 1 KOhm, +/- 1%, 125 mW, -55 to 155 degC, 0805 (2012 Metric), RoHS, Tape and Reel", Case Code (Imperial)=0805, Case Code (Metric)=2012, Manufacturer=Yageo, Max Operating Temperature=155degC, Max Power Dissipation=125mW, Min Operating Temperature=-55degC, Package Description="2-Pin Surface Mounted Device, Body 2 x 1.25 mm", Package Quantity=1, Resistance=1KOhm, Temperature Coefficient=100ppm/degreesC, Tolerance=1%, Voltage Rating=150V, Case/Package=0805, Composition=ThickFilm, Datasheet URL=http://www.yageo.com/NewPortal/yageodocoutput?fileName=/pdf/R-Chip/PYu-RC_Group_51_RoHS_L_5.pdf, Datasheet Version="Rev. 5, 10/2016", Depth=1.25mm, Height=0.024inch, Lead Free=LeadFree, Length=0.079inch, Manufacturer URL=http://www.yageo.com/, Military Standard=Not, Number of Pins=2, Number of Terminations=2, Package Reference=0805, Packaging=TapeandReel, Power Rating=125mW, REACH SVHC=Unknown, RoHSCompliant=true, Termination=SMD/SMT, Voltage Rating (DC)=150V, Width=0.049inch
R10: library part CMP-2001-00582-2, "Metal Film Chip Resistor, High Reliability Type, 0.125 W, +/- 0.1%, -55 to 155 degC, 0805 (2012 Metric), RoHS, Tape and Reel", Case Code - in=0805, Case Code - mm=2012, Manufacturer=Panasonic, Operating Temperature Range=-55Cto+155C, Package / Case=0805(2012metric), Package Description="2-Pin Surface Mount Device, Body 2 x 1.25 mm", Power Rating=125mW(1/8W), Resistance=10kOhms, Temperature Coefficient=25PPM/C, Tolerance=0.1%, Voltage Rating=100V, Brand=Panasonic, Datasheet URL=https://industrial.panasonic.com/cdbs/www-data/pdf/RDM0000/AOA0000C307.pdf, Datasheet Version=02/2016, Factory Pack Quantity=5000, Height=0.5mm, Length=2mm, Manufacturer URL=http://www.panasonic.com/, Mounting Technology=SurfaceMount, Package Reference=0805, Packaging=Reel, Product=ThinFilmResistorsSMD, Product Category=ThinFilmResistors-SMD, RoHS=Details, Series=ERA-6A, Termination Style=SMD/SMT, Type=MetalFilmChipResistors, Width=1.25mm
R11: library part CMP-2001-04239-1, Manufacturer="Vishay Dale", Part Number=CRCW08055K00FKTA
R12: library part CMP-2001-00614-1, Manufacturer=Panasonic, Part Number=ERA6AEB223V
U1: library part CMP-0299-00792-2, "3-V to 5.5-V Multichannel RS-232 Line Driver / Receiver with ±15-kV IEC ESD Protection, -40 to 85 degC, 16-Pin SOIC (D), Green (RoHS & no Sb/Br)", Drivers Per Package=2, Supply Voltage(s)(V)="3.3 or 5.0", ComponentLink1Description="Manufacturer URL", ComponentLink1URL=www.ti.com, ComponentLink2Description=Datasheet, ComponentLink2URL=http://www.ti.com/general/docs/lit/getliterature.tsp?genericPartNumber=MAX3232E&fileType=pdf, ComponentLink3Description="Package Specification", ComponentLink3URL=http://www.ti.com/litv/pdf/mpds178g, DatasheetVersion=SLLS664A, ESD HBM(kV)=+/-15, ICC(Max)(mA)=1, IEC-61000-4-2 SUPPORT=TRUE, PackageDescription="16-Pin Plastic Small Outline Integrated Circuit, 9.9 x 3.9 mm, Pitch 1.27 mm Pitch", PackageReference=D0016A, PackageVersion="revM, Jun-2011", Receivers Per Package=2, RS-232=TRUE, Single Supply=TRUE, SubFamily=RS-232
U2: library part CMP-06279-000047-1, "IC TRANSCEIVER 1/1 8SOIC", Case/Package=SOIC, Max Operating Temperature=150°C, Max Supply Voltage=5.5V, Min Operating Temperature=-40°C, Min Supply Voltage=4.5V, Operating Supply Current=70mA, Package Quantity=3300, Data Rate=8Mbps, Mount="Surface Mount", Number of Pins=8, Number of Transceivers=1, Packaging="Tape and Reel", Receiver Hysteresis=200mV, RoHS Compliant=Yes, Series=-, Weight=0.019048oz
U3: library part CMP-1685-00016-2, Ambient Temperature Range High=70°C, Case Code (Imperial)=0603, Case Code (Metric)=1608, Case/Package=PDIP, Dual Supply Voltage=9V, Input Bias Current=250nA, Input Offset Voltage (Vos)=2mV, Manufacturer Lifecycle Status=ACTIVE, Max Dual Supply Voltage=15V, Max Junction Temperature (Tj)=150°C, Max Output Voltage=7.5mV, Max Power Dissipation=500mW, Max Supply Current=7.5mA, Max Supply Voltage=30V, Min Dual Supply Voltage=1.75V, Min Operating Temperature=0°C, Min Supply Voltage=3.5V, Operating Supply Voltage=28V, Output Current=50mA, Power Rating=100mW, Resistance=390Ω, Tolerance=1%, Voltage Gain=106.02dB, Voltage Rating=75V, Contact Plating=Gold, Height=5.08mm, Lead Free="Lead Free", Length=9.81mm, Lifecycle Status=Production, Max Input Current=250nA, Max Operating Temperature=70°C, Mount="Surface Mount, Through Hole", NexarPartId=24336, Nominal Supply Current=7.5mA, Number Of Channels=1, Number Of Circuits=1, Number of Elements=1, Number of Pins=8, Output Current per Channel=50mA, Output Type=TTL, Packaging="Tape and Reel", Propagation Delay=115ns, Quiescent Current=7.5mA, Radiation Hardening=No, REACH SVHC="No SVHC", Response Time=165ns, RoHS=Compliant, Schedule B="8542390000, 8542390000", Thickness=3.9mm, Turn-On Delay Time=115ns, Type="General Purpose", Weight=2.012816mg, Width=6.35mm
U4: library part CMP-0017-00239-2, "General-Purpose Operational Amplifier, 7 to 36 V, 0 to 70 degC, 8-pin SOIC (D8), Green (RoHS & no Sb/Br)", Manufacturer="Texas Instruments", Total Supply Voltage(Max)(+5V is 5, +/-5V is 10)=36, Total Supply Voltage(Min)(+5V is 5, +/-5V is 10)=7, CMRR(Min)(dB)=70, Code_JEDEC=MS-012, ComponentLink1Description="Manufacturer URL", ComponentLink1URL=http://www.ti.com/, ComponentLink2Description=Datasheet, ComponentLink2URL=http://www.ti.com/lit/ds/symlink/ua741.pdf, ComponentLink3Description="Package Specification", ComponentLink3URL=http://www.ti.com/litv/pdf/msoi002j, DatasheetVersion=SLOS094B, Eco-Plan="Green (RoHS & no Sb/Br)", GBW(Typ)(MHz)=1, IIB(Max)(pA)=1500000, Iq per channel(Max)(mA)=2.8, Mounting Technology="Surface Mount", Number Of Channels=1, PackageDescription="8-Pin Plastic Small Outline, Body 4.9 x 3.9 mm, Pitch 1.27 mm", PackageReference=D0008A, PackageVersion="4040047-3/M, 06/2011", PartNumber=UA741CDR, Slew Rate(Typ)(V/us)=0.5, Sub Family="General Purpose Amplifier, High Supply Voltage Amplifier (>=30V)", Vio (25C)(Max)(mV)=6
U5: "No Description Available", Mfr_Name="Diodes Inc", RefDes=RefDes, Type=Type

## Via types
v1: diameter 1.27, hole 0.711, Top Layer to Bottom Layer, 45 vias

## Nets (pads, with @x,y where several pads share a name; then routed paths per layer and width w, separated by ;. In a path a pad name is that pad's centre, name@x,y a point inside that pad or via, vN(x,y) a via of type N, cw(c..) or ccw(c..) an arc to the next point about the centre after c; other vN are vias at no path point)
3.3VIN: C7.1 C16.1 J1.7 P3.1 U1.16 U2.5 | length 102.3
  Top Layer w0.254: J1.7 14.65,61.23 14.65,35.598 15.723,34.525 32.15,34.525 ; U2.5 26.945,18.685 28.085,19.825 33.05,19.825 33.05,33.625 32.15,34.525 ; U1.16@55.783,24.981 C7.1@58.044,24.981 ; C7.1@58.15,24.875 C7.1@58.044,24.981 ; 32.15,34.525 49.301,34.525 58.001,25.825 58.001,25.024 C7.1@58.044,24.981
5VIN: C13.1 C14.1 C15.1 C17.2 C18.1 J6.1 L1.2 R7.2 R12.1 U2.3 U3.8 U4.7 | length 109.2
  Top Layer w0.254: 8.95,76.825 3.05,70.925 3.05,63.225 4.35,61.925 10.35,61.925 13.556,58.719 13.63,58.645 13.63,34.445 16.124,31.951 27.001,31.951 27.15,31.802 C18.1 27.15,25.825 28.215,24.76 U2.3 ; 42.15,79.125 42.15,83.825 47.05,88.725 55.93,88.725 U3.8 ; R12.1 44.75,77.715 49.975,72.49 U4.7
12VENC: CR1.1 P2.1 Q1.3
12VIN: C9.1 P1.1 P6.1 Q1.2 Q3.2 R1.2 R3.2 U5.2 U5.3
12VMOTOR: CR2.1 P4.1 Q3.3
CAN_RX_3.3V: J2.25 U2.4 | length 15.5
  Top Layer w0.254: J2.25@17.23,18.424 17.186,18.38 17.112,18.306 17.112,18.201 17.112,18.185 J2.25 18.337,19.209 18.337,20.88 19.282,21.825 23.637,21.825 26.137,24.325 26.796,24.325 26.945,24.176 U2.4
CAN_TX_3.3V: J2.27 U2.1 | length 18.1
  Top Layer w0.254: J2.27 18.315,16.647 18.315,18.318 19.185,19.187 21.812,19.187 23.45,20.825 29.815,20.825 30.755,21.765 U2.1
CANH: J11.2 J12.2 R9.1 U2.7 | length 23.4
  Top Layer w0.254: U2.7 29.485,16.881 29.95,16.416 R9.1 29.95,13.625 30.2,13.375 41.5,13.375 42.31,12.565 42.31,10.685 J11.2 J12.2
CANL: J11.1 J12.1 R9.2 U2.6 | length 22.2
  Top Layer w0.254: U2.6 28.215,16.83 27.95,16.565 R9.2 28.007,14.768 28.007,13.868 29.25,12.625 38.75,12.625 39.71,11.665 J11.1 39.71,8.915 40.25,8.375 J12.1
ENC: J2.29 R2.1 | length 25.6
  Top Layer w0.254: R2.1@11.25,33.825 12.75,33.825 13,33.575 13,14.625 14.699,12.926 J2.29
"ENC RX": J9.2 J10.2 U1.8 | length 12.7
  Top Layer w0.254: U1.8@50.333,16.091 49.399,16.091 49.25,15.943 49.25,15.375 J9.2 J10.2
"ENC TX": J9.1 J10.1 U1.7 | length 13.9
  Top Layer w0.254: U1.7@50.333,17.361 50.173,17.202 49.227,17.202 48.35,16.325 48.35,14.525 51.218,11.657 51.218,10.867 J9.1 51.46,8.915 52,8.375 J10.1
ENC_RX_3.3V: J2.4 U1.9 | length 61.6
  Top Layer w0.254: J2.4 40.829,45.946 60.85,25.925 60.85,19.85 57.248,16.248 56.478,16.248 U1.9
ENC_TX_3.3V: J2.6 U1.10 | length 58.4
  Top Layer w0.254: J2.6 42.269,43.406 60.136,25.539 60.136,20.739 56.759,17.361 U1.10@55.783,17.361
GND: C1.2 C2.2 C3.2 C5.2 C7.2 C9.2 C11.2 C12.1 C13.2 C14.2 C15.2 C16.2 C17.1 C18.2 CR1.2 CR2.2 D1.2 D2.2 J1.11 J1.13 J2.23 J6.2 J7.3 J8.3 J9.3 J10.3 J11.3 J12.3 P1.2 P2.2 P3.2 P4.2 P6.2 P7.1 P7.2 Q2.2 Q4.2 R5.1 R8.1 R10.1 U1.15 U2.2 U3.1 U3.4 U4.4 U5.7 U5.EPAD | length 24.8
  Top Layer w0.254: v1(23.221,25.885) 23.261,25.925 C18.2@25.45,25.925 ; v1(29.25,25.125) 29.415,24.96 29.415,22.713 U2.2 ; v1(32.25,69.125) C17.1 ; v1(33.05,16.425) C16.2@33.05,18.125 ; v1(44.7,17.9) 46.2,17.9 C3.2 ; v1(44.9,23.7) C5.2@46.5,23.7 ; v1(47.219,78.019) 47.219,79.594 R10.1 48.45,79.625 48.76,79.315 U3.4 ; v1(47.65,86.825) 49.67,86.825 U3.1 ; v1(55.55,76.409) 55.55,75.055 U4.4 ; U1.15@55.783,23.711 57.514,23.711 58.05,23.175 58.15,23.175 v1(58.15,21.525)
  other v1: 8.45,15.825 10.25,15.825 8.65,40.725 10.55,40.725 23.25,80.125 25.25,80.125 27.25,80.125 29.25,80.125 31.25,80.125 33.25,80.125 23.25,82.125 25.25,82.125 27.25,82.125 29.25,82.125 31.25,82.125 33.25,82.125 23.25,84.125 25.25,84.125 27.25,84.125 29.25,84.125 31.25,84.125 33.25,84.125 29.25,86.125 31.25,86.125 33.25,86.125 29.25,88.125 31.25,88.125 33.25,88.125 31.25,90.125 33.25,90.125
"GPIO DIR": J4.2 U3.2 | length 37.4
  Top Layer w0.254: v1(52.85,69.125) 52.75,69.025 52.75,66.125 61.673,57.202 61.673,57.159 62.365,56.467 62.408,56.467 65.291,53.584 J4.2
  Bottom Layer w0.254: U3.2 52.85,81.325 v1(52.85,69.125)
MOTOR-CONT: J2.30 R4.1 | length 10.5
  Top Layer w0.254: R4.1@10.95,8.525 15.272,8.525 J2.30
NetC1_1: C1.1 D1.1 Q2.1 R2.2
NetC2_1: C2.1 D2.1 Q4.1 R4.2
NetC3_1: C3.1 U1.6 | length 3
  Top Layer w0.254: C3.1 49,18 49.66,18.66 U1.6
NetC4_1: C4.1 U1.1 | length 2.9
  Top Layer w0.254: U1.1@50.333,24.981 50.4,25.049 50.4,25.6 50.977,26.177 51.777,26.177 52,26.4 C4.1
NetC4_2: C4.2 U1.3 | length 5.9
  Top Layer w0.254: U1.3 51.073,22.643 51.743,22.643 53.9,24.8 C4.2
NetC5_1: C5.1 U1.2 | length 2
  Top Layer w0.254: C5.1 48.311,23.711 U1.2@50.333,23.711
NetC6_1: C6.1 U1.4 | length 2.2
  Top Layer w0.254: C6.1 49.975,21.7 50.475,21.2 U1.4
NetC6_2: C6.2 U1.5 | length 2.1
  Top Layer w0.254: C6.2 48.965,19.865 50.835,19.865 U1.5
NetC10_1: C10.1 U5.1
NetC10_2: C10.2 L1.1 U5.8 | length 11.4
  Bottom Layer w0.254: v1@13.499,86.745 v1(24.947,86.745)
  other v1: 13.499,86.695
NetC11_1: C11.1 R6.2
NetC12_2: C12.2 R6.1 U5.6
NetP5_1: P5.1 R11.1
NetP5_2: P5.2 R11.2
NetP8_1: P8.1 U4.2 U4.6 | length 39
  Top Layer w0.254: U4.6 50.675,73.76 54.34,77.425 57.501,77.425 57.65,77.276 57.65,74.225 ; U4.2 55.925,72.49 57.65,74.215 57.65,74.225 ; P8.1@69.25,93.625 60.25,84.625 60.25,76.825 57.65,74.225
NetP8_2: P8.2 U3.7 | length 22.3
  Top Layer w0.254: U3.7 69.25,95.925 72.03,95.925 P8.2@74.33,93.625
NetQ1_1: Q1.1 Q2.3 R1.1
NetQ3_1: Q3.1 Q4.3 R3.1
NetR5_2: R5.2 U5.4
NetR7_1: R7.1 R8.2 U5.5 | length 0.1
  Top Layer w0.254: R8.2@20.516,96.501 R8.2
NetR10_2: R10.2 R12.2 U3.3 | length 5.4
  Top Layer w0.254: R12.2 47.2,81.075 R10.2 48.78,81.125 49.51,81.855 U3.3
PA5: J2.11 U4.3 | length 65
  Top Layer w0.254: J2.11 15.45,37.47 15.45,50.276 16.599,51.425 32.89,51.425 55.225,73.76 U4.3
"SCL P": J2.19 J7.1 J8.1 | length 33.5
  Top Layer w0.254: v1(14.5,14.875) 14.5,22.993 J2.19 ; v1(19.25,10.375) 28.46,10.375 J7.1 28.71,6.665 J8.1
  Bottom Layer w0.254: v1(14.5,14.875) 14.5,13.05 17.175,10.375 v1(19.25,10.375)
"SDA P": J2.21 J7.2 J8.2 | length 30.5
  Top Layer w0.254: J2.21 16.961,23.086 15.5,21.625 15.5,15.43 16.823,14.107 25.658,14.107 27.648,12.117 29.758,12.117 J7.2 31.125,10.5 31.125,6.5 J8.2
pads on no net: J1.1 J1.2 J1.3 J1.4 J1.5 J1.6 J1.8 J1.9 J1.10 J1.12 J1.14 J1.15 J1.16 J2.1 J2.2 J2.3 J2.5 J2.7 J2.8 J2.9 J2.10 J2.12 J2.13 J2.14 J2.15 J2.16 J2.17 J2.18 J2.20 J2.22 J2.24 J2.26 J2.28 J3.1 J3.2 J3.3 J3.4 J3.5 J3.6 J3.7 J3.8 J3.9 J3.10 J3.11 J3.12 J3.13 J3.14 J3.15 J3.16 J3.17 J3.18 J3.19 J3.20 J4.1 J4.3 J4.4 J4.5 J4.6 J4.7 J4.8 J4.9 J4.10 J4.11 J4.12 J4.13 J4.14 J4.15 J4.16 J4.17 J4.18 J4.19 J4.20 J4.21 J4.22 J4.23 J4.24 J4.25 J4.26 J4.27 J4.28 J4.29 J4.30 J4.31 J4.32 J4.33 J4.34 U1.11 U1.12 U1.13 U1.14 U2.8 U3.5 U3.6 U4.1 U4.5 U4.8

## Polygon pours and split planes (outlines as drawn)
NetP5_2 on Top Layer "NETP5_2_L01_P111" (solid, pour order 111): 66.9,81.375 67.5,80.775 69.3,80.775 70.6,82.075 75.2,82.075 76,82.875 76,84.275 75.3,84.975 68.6,84.975 66.9,83.275
GND on Top Layer "GND_L01_P078" (solid, pour order 78): 21.5,89.375 19.95,87.825 19.95,78.525 35,78.525 35,91.375 27.575,91.375 27.575,85.4 24.1,85.4 23.6,85.9 23.6,89.375 24.325,90.1 24.325,94.9 25.125,95.7 25.125,98.175 21.525,98.175 21.525,92.775 17.925,92.775 17.925,93.2 17.55,93.575 15.55,93.575 15.15,93.175 15.15,92.775 13.15,92.775 13,92.625 13,91.125 13.5,90.625 17,90.625 18.3,91.925 21.5,91.925
no net on Top Layer "NONET_L01_P079" (solid, pour order 79): 14,90.625 14.5,91.125
NetC10_2 on Top Layer "NETC10_2_L01_P075" (solid, pour order 75): 18,90.125 19.5,91.625 21,91.625 21,90.625 15.5,85.125 8.5,85.125 8.5,90.125
NetP5_1 on Top Layer "NETP5_1_L01_P112" (solid, pour order 112): 66.95,79.725 67.65,80.425 69.35,80.425 70.25,79.525 75.05,79.525 75.85,78.725 75.85,77.825 75.15,77.125 67.55,77.125 66.95,77.725
GND on Top Layer "GND_L01_P096" (solid, pour order 96): 7.35,33.825 8.05,34.525 8.05,39.025 8.65,39.625 9.75,39.625 10.35,39.025 10.35,35.525 10.65,35.225 11.65,35.225 11.95,35.525 11.95,41.225 11.35,41.825 7.95,41.825 7.25,41.125 7.25,36.525 5.55,36.525 5.45,36.425 5.45,33.825 5.55,33.725 7.25,33.725
3.3VIN on Top Layer "3.3VIN_L01_P110" (solid, pour order 110): 3.75,65.425 3.75,63.925 4.85,62.825 17.55,62.825 18.25,63.525 18.25,64.525 17.85,64.925 7.45,64.925 6.25,66.125 4.55,66.125
GND on Top Layer "GND_L01_P106" (solid, pour order 106): 11.85,24.325 12.15,24.625 12.15,25.425 11.85,25.725 7.75,25.725 7.05,26.425 7.05,28.225 6.55,28.725 4.85,28.725 4.25,28.125 4.25,25.025 4.95,24.325 11.45,24.325
12VMOTOR on Top Layer "12VMOTOR_L01_P105" (solid, pour order 105): 3.15,17.525 4.55,16.125 5.85,16.125 6.55,16.825 6.55,20.425 7.75,21.625 11.65,21.625 12.25,22.225 12.25,23.125 11.95,23.425 5.45,23.425 3.15,21.125
NetC2_1 on Top Layer "NETC2_1_L01_P104" (solid, pour order 104): 5.85,8.225 7.75,8.225 8.15,8.625 8.15,13.725 8.55,14.125 9.15,14.125 9.65,13.625 9.65,7.925 9.35,7.925 8.45,7.025 5.85,7.025 5.55,7.325 5.55,7.925
GND on Top Layer "GND_L01_P103" (solid, pour order 103): 7.65,13.725 8.35,14.425 9.55,14.425 9.95,14.025 9.95,10.025 10.25,9.725 11.35,9.725 11.65,10.025 11.65,16.725 11.25,17.125 7.45,17.125 7.05,16.725 7.05,11.425 5.85,11.425 5.75,11.325 5.75,8.725 5.85,8.625 7.55,8.625 7.65,8.725
NetQ3_1 on Top Layer "NETQ3_1_L01_P102" (solid, pour order 102): 3.15,14.725 3.15,7.825 3.65,7.325 4.75,7.325 5.35,7.925 5.35,11.375 4.9,11.825 4.9,14.675 4.45,15.125 3.55,15.125
GND on Top Layer "GND_L01_P101" (solid, pour order 101): 4,51.875 5.5,50.375 12,50.375 12,52.125 7.75,52.125 6.75,53.125 6.75,60.625 6,61.375 4.75,61.375 4,60.625
12VENC on Top Layer "12VENC_L01_P100" (solid, pour order 100): 4,42.125 5.75,42.125 6.75,43.125 6.75,46.375 8.25,47.875 12.25,47.875 12.25,49.375 5,49.375 3,47.375 3,43.125
5VIN on Top Layer "5VIN_L01_P076" (solid, pour order 76): 36.25,77.825 38.55,80.125 45.65,80.125 45.95,79.825 45.95,78.225 45.55,77.825 39.75,77.825 37.35,75.425 9.2,75.425 5.5,79.125 5.5,96.625 6.5,97.625 17.5,97.625 17.5,95.625 7.5,95.625 7,95.125 7,83.625 7.5,83.125 16,83.125 18.5,85.625 19,85.625 19.5,85.125 19.5,78.475 20.15,77.825
NetC11_1 on Top Layer "NETC11_1_L01_P080" (solid, pour order 80): 12,95.125 12,91.125 10.5,91.125 10.5,95.125
NetC12_2 on Top Layer "NETC12_2_L01_P081" (solid, pour order 81): 13,95.125 18,95.125 19,94.125 21,94.125 21,93.125 20.9,93.025 18.6,93.025 17.5,94.125 13,94.125
NetR7_1 on Top Layer "NETR7_1_L01_P084" (solid, pour order 84): 18.1,97.625 18.1,95.625 19.3,94.425 21.2,94.425 21.2,97.625
NetC10_2 on Top Layer "NETC10_2_L01_P086" (solid, pour order 86): 24.25,89.375 24.25,85.875 25.75,85.875 25.75,89.375
12VIN on Top Layer "12VIN_L01_P088" (solid, pour order 88): 53.65,99.75 53.65,91.875 51.8,91.875 24.75,91.875 24.75,93.875 34.75,93.875 34.75,98.45 3.325,98.45 2.5,97.625 2.5,43.125 3.8,41.825 6.05,41.825 7,40.875 7,37.375 6.75,37.125 5.25,37.125 5,37.375 5,40.975 4.75,41.225 2.75,41.225 2.5,40.975 2.5,17.675 4.25,15.925 6.05,15.925 6.75,15.225 6.75,12.025 6.45,11.725 5.45,11.725 5.15,12.025 5.15,14.825 4.55,15.425 3.75,15.425 0.65,18.525 0.65,97.775 2.625,99.75
NetR5_2 on Top Layer "NETR5_2_L01_P089" (solid, pour order 89): 24.75,94.625 25.5,95.375 25.5,98.125 27.25,98.125 27.25,95.375 26,94.125 24.75,94.125
NetC10_1 on Top Layer "NETC10_1_L01_P090" (solid, pour order 90): 24.75,90.625 25.75,89.625 26,89.625 26,87.625 27.25,87.625 27.25,90.625 26.25,91.625 24.75,91.625
NetC1_1 on Top Layer "NETC1_1_L01_P094" (solid, pour order 94): 8.35,38.675 8.35,33.125 7.95,32.725 5.75,32.725 5.45,32.425 5.45,32.025 5.65,31.825 9.25,31.825 10.05,32.625 10.05,38.625 9.65,39.025 8.63,39.025
NetQ1_1 on Top Layer "NETQ1_1_L01_P092" (solid, pour order 92): 2.95,40.625 2.95,33.025 3.45,32.525 4.55,32.525 5.15,33.125 5.15,36.575 4.7,37.025 4.7,40.575 4.35,40.925 3.25,40.925
GND on Bottom Layer "GND_L02_P113" (solid, pour order 113): 0.25,97.625 2.4,99.775 77.6,99.775 79.25,98.125 79.25,1.125 78.25,0.125 1.75,0.125 0.25,1.625

## Silkscreen, mask and mechanical layers (free items; w line width, h text height)
Top Overlay:
  drawing of 21 lines, arcs and shapes, not listed
  text "12VIN" at 34.054,98.254 h1.52
  text "GND" at 41.854,98.254 h1.52
  text "12VOUT" at 47.554,98.254 h1.52
  text "GND" at 57.054,98.254 h1.52
  text "P1-13" at 64.854,98.254 h1.52
  text "P1-8" at 72.954,98.254 h1.52
  text "PWR" at 30.454,94.954 h1.52
  text "POUT" at 59.504,93.629 h1.52
  text "P1-12" at 72.254,86.629 h1.52
  text "P1-14" at 72.254,72.129 h1.52
  text "GND" at 74.254,69.379 h1.52
  text "IMU" at 1.25,67.891 h1.52
  text "GND" at 1.25,55.641 h1.52
  text "GND" at 74.254,54.879 h1.52
  text "ENC" at 1,43.391 h1.52
  text "GND" at 0.75,29.141 h1.52
  text "CONT" at 0.5,17.141 h1.52
  text "RUDDER BOB V2" at 76.396,12.179 h1.52 r90
  text "GND" at 48.496,3.379 h1.52 r90
  text "GND" at 60.496,3.379 h1.52 r90
  text "GND" at 37.246,3.129 h1.52 r90
  text "SCL" at 25.754,0.879 h1.52
  text "SDA" at 31.254,0.879 h1.52
  text "CANL" at 37.004,0.879 h1.52
  text "CANH" at 43.754,0.879 h1.52
  text "TX" at 50.754,0.879 h1.52
  text "RX" at 54.754,0.879 h1.52

## Text inside footprints (layer, text, board x,y; h text height)
CR1: Top 3D Body "*" at 11.985,48.887 h1.27 r90; Top Overlay "*" at 11.985,47.421 h1.27 r90
CR2: Top 3D Body "*" at 12.085,22.787 h1.27 r90; Top Overlay "*" at 12.085,21.321 h1.27 r90
U5: Top 3D Body "*" at 24.807,91.711 h1.27 r180; Top Overlay "*" at 24.5,91.875 h1.27 r180